# Altium PCB EMG_Sensors_Power.PcbDoc
Units mm, origin at the board's own origin, x right, y up, seen from the top; angles counter-clockwise.
Board outline 30 x 55.02 mm, 2 copper layers (Top Layer, Bottom Layer), stack 1.57 mm thick; 27 components, 17 nets, 112 pads, 15 vias.
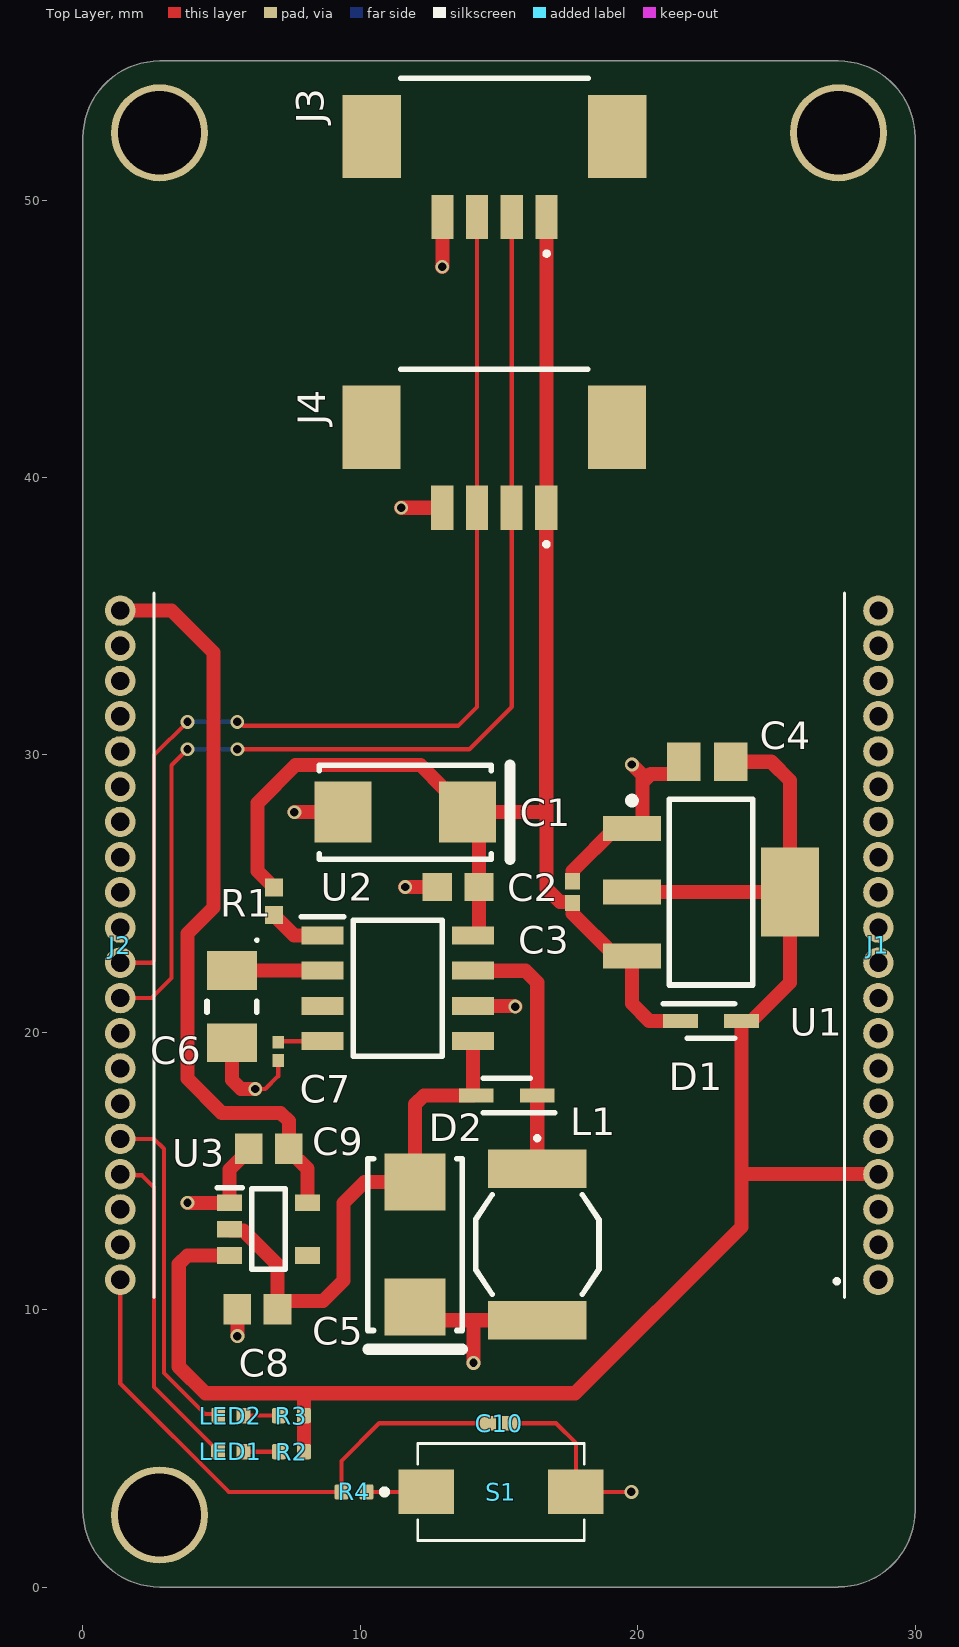
[diagram p0: Top Layer view]
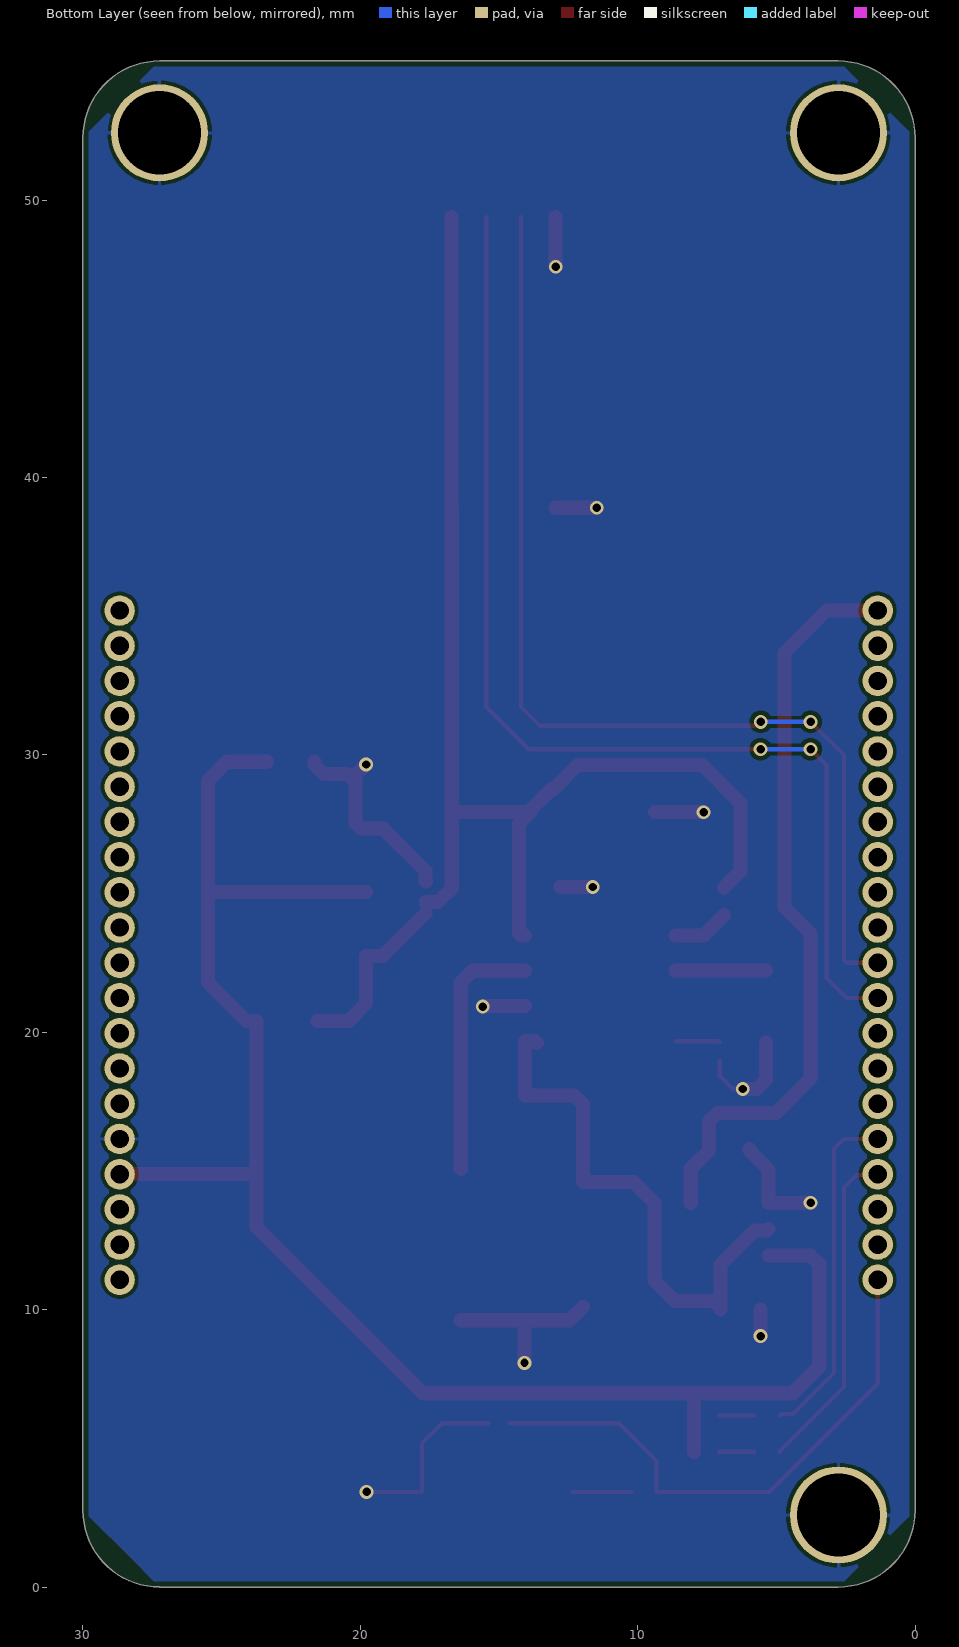
[diagram p1: Bottom Layer view, seen from below]
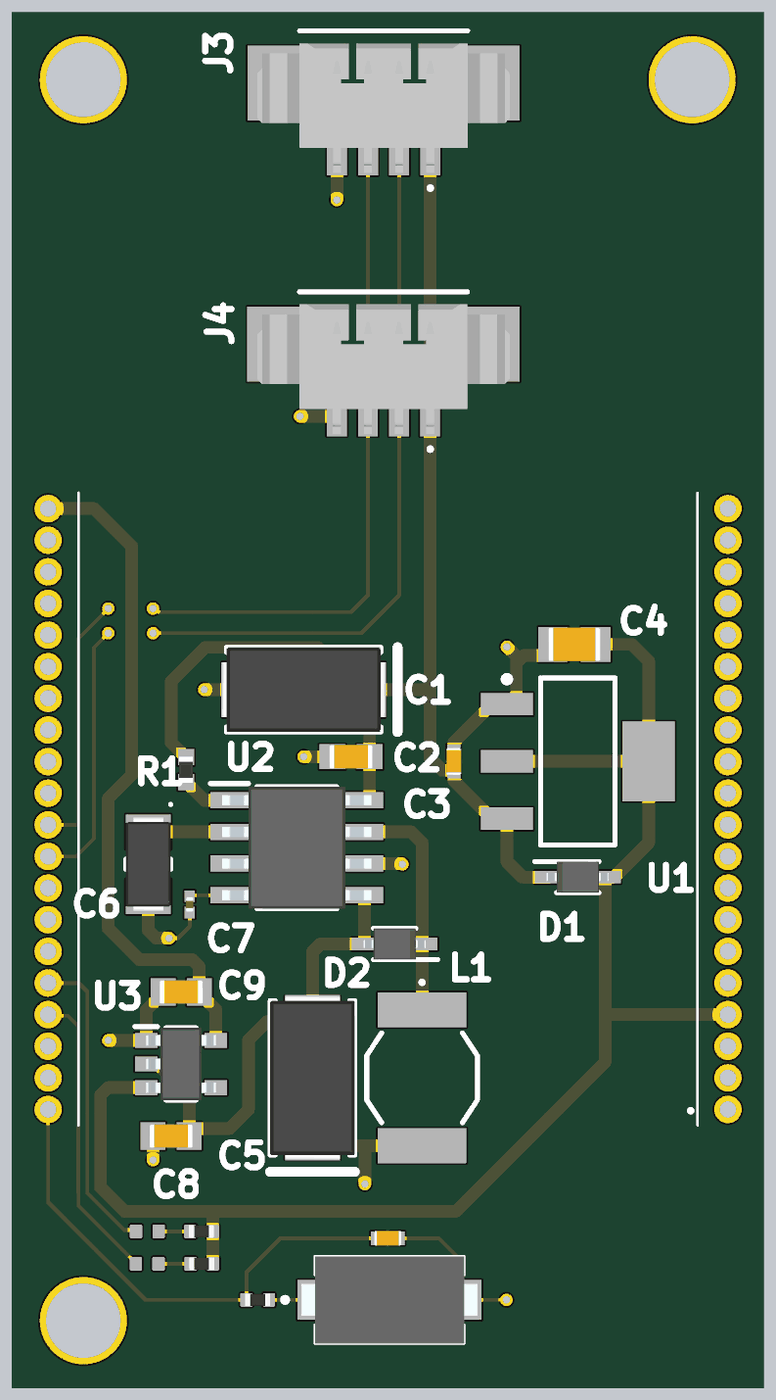
[diagram p2: 3D render of the assembled board from above, using the file's embedded part models]

## Layer stack, top to bottom
Top Solder: solder mask 0.01, Solder Resist, Dk 3.8
Top Layer: signal copper 0.035
Dielectric: core 1.5, FR-4, Dk 4.5
Bottom Layer: signal copper 0.035
Bottom Solder: solder mask 0.01, Solder Resist, Dk 3.8

## Board outline
0,2.763 0,52.254 cw(c2.762,52.254) 2.762,55.016 27.235,55.016 cw(c27.235,52.254) 29.997,52.254 29.997,2.764 cw(c27.235,2.764) 27.235,0.001 27.235,0 2.762,0 cw(c2.762,2.763)

## Design rules (kind name [scope] priority, off if disabled: settings)
BoardOutlineClearance [All] p1: gap=0.2 ignorepadtopadclearanceinfootprint=FALSE
Clearance [All] p1: gap=0.127 ignorepadtopadclearanceinfootprint=FALSE except(0.2: Arc-SMDPad Arc-THPad Track-SMDPad Track-THPad; 0.25: SMDPad-Hole THPad-Hole Via-Hole Fill-Hole Poly-Hole Region-Hole Text-Hole; 0.254: Arc-Via Track-Via; 0.33: Arc-Hole Track-Hole)
ComponentClearance [All] p1: gap=0.127 collisioncheckmode=3 verticalgap=0.127 showdistances=TRUE
DiffPairsRouting [All] p1: maxlimit=0.254 minlimit=0.127 mostfreqgap=0.127 toplayer_minwidth=0.127 toplayer_maxwidth=25.4 toplayer_prefwidth=0.127 bottomlayer_minwidth=0.127 bottomlayer_maxwidth=25.4 bottomlayer_prefwidth=0.127 maxuncoupledlength=12.7
Height [All] p1: minheight=0 maxheight=1816.048 prefheight=12.7
HoleSize [All] p1: absolutevalues=TRUE maxlimit=6.3 minlimit=0.3 maxpercent=80.000 minpercent=20.000
HoleToHoleClearance [All] p1: gap=0.25 allowstackedmicrovias=FALSE
MinimumAnnularRing [All] p1: minimumring=0.076
MinimumSolderMaskSliver [All] p1: minsoldermaskwidth=0
PlaneClearance [All] p1: clearance=0.127
PlaneConnect PlaneConnectPowerPads [InPadClass('PowerPads')] p1: planeconnectstyle=Direct reliefexpansion=0.508 reliefentries=4 reliefconductorwidth=0.254 reliefairgap=0.254
PlaneConnect [All] p2: pad.planeconnectstyle=Relief pad.reliefexpansion=0.3 pad.reliefentries=4 pad.reliefconductorwidth=0.127 pad.reliefairgap=0.127 via.planeconnectstyle=Direct via.reliefexpansion=0.3 via.reliefentries=4 via.reliefconductorwidth=0.127 via.reliefairgap=0.127
PolygonConnect PolygonConnectPowerPads [All vs (InPadClass('PowerPads'))] p1: connectstyle=Direct reliefconductorwidth=0.254 reliefentries=4 polygonreliefangle="90 Angle" airgapwidth=0.254
PolygonConnect [All] p2: thpad.connectstyle=Relief thpad.reliefconductorwidth=0.127 thpad.reliefentries=4 thpad.polygonreliefangle="90 Angle" thpad.airgapwidth=0.127 smdpad.connectstyle=Relief smdpad.reliefconductorwidth=0.127 smdpad.reliefentries=4 smdpad.polygonreliefangle="90 Angle" smdpad.airgapwidth=0.127 via.connectstyle=Direct via.reliefconductorwidth=0.127 via.reliefentries=4 via.polygonreliefangle="90 Angle" via.airgapwidth=0.127
RoutingVias [All] p1: holewidth=0.3 width=0.5 viastyle="Through Hole" minholewidth=0.3 minwidth=0.5 maxholewidth=1.5 maxwidth=6.6
SilkToSilkClearance [All] p1: silktosilkclearance=0
SilkToSolderMaskClearance [IsPad] p1: minsilkscreentomaskgap=0.127 clearancetoexposedcopper=TRUE
SolderMaskExpansion [All] p1: expansion=0.075 istentingtop=FALSE
Width [All] p1: maxlimit=0.508 minlimit=0.152 preferedwidth=0.254 minimp=50.000000 maximp=50.000000 favimp=50.000000
20 further rules are at their usual default settings.

## Components (designator, comment, footprint, x,y, rotation, side; value= is the part's Value field where it differs from the comment)
C1 "TAJC476K016RNJ" AVX-TAJ-C-2_L 11.618,27.934 r180 top value=47µF
C2 "Capacitor 1 uF +/- 10% 16 V 0603" CAPC1608X94X35NL15T15 13.523,25.239 r180 top value=1µF
C3 "Capacitor 0.1 uF +/- 5% 16 V 0402" CAPC1005X56X25LL10T15 17.654,25.053 r90 top value=100nF
C4 "Capacitor 10 uF +/- 10% 16 V 0805" CAPC2013X135X45NL10T25 22.507,29.752 r180 top value=10µF
C5 "TAJC107K010RNJ" AVX-TAJ-C-2_L 11.974,12.347 r90 top value=100µF
C6 "TAJA106K016RNJ" CAPMP3217X18-T_V 5.372,20.924 r270 top value=10µF
C7 "82pF" CAPC0603X33N 7.037,19.308 r270 top
C8 "Capacitor 1uF +/- 10% 16V 0603" CAPC1608X90X35ML15T15 6.291,10.006 r0 top value=1µF
C9 "Capacitor 1uF +/- 10% 16V 0603" CAPC1608X90X35ML15T15 6.698,15.794 r0 top value=1µF
C10 "Capacitor 0.1 uF +/- 5% 16 V 0402" CAPC1005X56X25LL10T15 14.999,5.904 r0 top value=100nF
D1 "B5819WS-TP" SOD2512X115N 22.639,20.405 r0 top
D2 "B5817WS-TP" SOD2512X115N 15.279,17.72 r180 top
J1 "TMS-120-02-G-S" TMS-120-YY-XX-S 28.677,11.074 r90 top locked
J2 "TMS-120-02-G-S" TMS-120-YY-XX-S 1.346,11.074 r90 top locked
J3 "53261-0471" 53261-0471 14.834,50.19 r180 top
J4 "53261-0471" 53261-0471 14.828,39.708 r180 top
L1 "10µH" DO1608C 16.379,12.347 r270 top
LED1 "QBLP595-IG" QTB-QBLP595_V 5.329,4.877 r0 top
LED2 "QBLP595-IG" QTB-QBLP595_V 5.333,6.179 r0 top
R1 "Resistor 10k +/-1% 0402 63 mW" RESC1005X40X25ML05T05 6.887,24.719 r270 top value=10k
R2 "Resistor 330R +/-5 % 0402 63 mW" RESC0402(1005)_L 7.518,4.877 r180 top value=330
R3 "Resistor 330R +/-5 % 0402 63 mW" RESC0402(1005)_L 7.512,6.179 r180 top value=330
R4 "Resistor 330R +/-5 % 0402 63 mW" RESC0402(1005)_L 9.771,3.429 r0 top value=330
S1 "DTSM-31N-V-T_R" DTSM32NVTR 15.071,3.429 r0 top
U1 "LD1117S33TR" SOT-223_L 22.639,25.053 r0 top
U2 "TPS6735ID" SOIC127P600X175-8N 11.346,21.584 r0 top
U3 "XC6901D331MR-G" SOT95P280X130-5N 6.687,12.901 r0 top

## Footprints (in the part's own frame and the unit in brackets; to place one, negate y for a bottom-side part, rotate by r counter-clockwise, add the part's x,y. Pads: shape width x height; smd on the part's side, far side on the other; paste and mask are expansions set on the pad)
53261-0471 [mm]
  rect 0.8x1.6 smd: 1(-1.875,0.8) 2(-0.625,0.8) 3(0.625,0.8) 4(1.875,0.8)
  rect 2.1x3 smd: 5(4.425,-2.1) 6(-4.425,-2.1)
  silkscreen extent -3.37,-4.2 3.37,2.17, body extent -5.07,-3.69 5.07,1.51, height 3.4
AVX-TAJ-C-2_L [mm] "Molded Capacitor, 2-Leads, Body 6.2x3.4mm, IPC High Density"
  rect 2.05x2.2 smd: 1(-2.25,0) 2(2.25,0)
  silkscreen extent -3.77,-1.7 3.1,1.7, body extent -3.32,-1.7 3.32,1.7, height 2.8
CAPC0603X33N [mm]
  rect 0.46x0.42 smd: 1(-0.33,0) 2(0.33,0)
  body extent -0.3,-0.15 0.3,0.15, height 0.33
CAPC1005X56X25LL10T15 [mm] "Chip Capacitor, 2-Leads, Body 1.10x0.60mm, IPC High Density"
  rect 0.58x0.54 smd: 1(-0.39,0) 2(0.39,0)
  body extent -0.55,-0.3 0.55,0.3, height 0.56
CAPC1608X90X35ML15T15 [mm] "Chip Capacitor, 2-Leads, Body 1.75x0.95mm, IPC Low Density"
  rect 1x1.1 smd: 1(-0.725,0) 2(0.725,0)
  body extent -0.87,-0.48 0.87,0.48, height 0.9
CAPC1608X94X35NL15T15 [mm] "Chip Capacitor, 2-Leads, Body 1.75x0.96mm, IPC Medium Density"
  rect 1.05x1 smd: 1(-0.75,0) 2(0.75,0)
  body extent -0.87,-0.48 0.87,0.48, height 0.94
CAPC2013X135X45NL10T25 [mm] "Chip Capacitor, 2-Leads, Body 2.10x1.35mm, IPC Medium Density"
  rect 1.2x1.4 smd: 1(-0.85,0) 2(0.85,0)
  body extent -1.05,-0.67 1.05,0.67, height 1.35
CAPMP3217X18-T_V [mm] "Molded Capacitor, 2-Leads, Body 3.40x1.8mm"
  rect 1.4x1.8 smd: 1(-1.3,0) 2(1.3,0)
  silkscreen extent -2.45,-0.9 0.2,0.95, body extent -1.92,-0.9 1.92,0.9, height 1.8
DO1608C [mm]
  rect 1.4x3.56 smd: 1(-2.73,0) 2(2.73,0)
  silkscreen extent -3.88,-2.22 1.8,2.22
DTSM32NVTR [mm]
  rect 2x1.6 smd: 1(-2.7,0) 2(2.7,0)
  silkscreen extent -4.3,-1.75 3,1.75, body extent -3.54,-1.75 3.54,1.75, height 5.1
QTB-QBLP595_V [mm] "SMD, 2-Leads, Body 1x0.5mm"
  rrect25% 0.5x0.55 smd: 1(-0.455,0) 2(0.455,0)
  body extent -0.5,-0.25 0.5,0.25, height 0.5
RESC0402(1005)_L [mm] "Chip Resistor, Body 1.0x0.5mm, IPC High Density"
  rrect25% 0.5x0.55 smd: 1(-0.45,0) 2(0.45,0)
  body extent -0.5,-0.25 0.5,0.25, height 0.3
RESC1005X40X25ML05T05 [mm] "Chip Resistor, 2-Leads, Body 1.05x0.55mm, IPC Low Density"
  rect 0.65x0.65 smd: 1(-0.5,0) 2(0.5,0)
  body extent -0.53,-0.28 0.53,0.28, height 0.4
SOD2512X115N [mm]
  rect 1.25x0.5 smd: 1(-1.1,0) 2(1.1,0)
  silkscreen extent -1.73,-0.63 0.85,0.63, body extent -1.25,-0.63 1.25,0.63, height 1.15
SOIC127P600X175-8N [mm]
  rect 1.525x0.65 smd: 1(-2.712,1.905) 2(-2.712,0.635) 3(-2.712,-0.635) 4(-2.712,-1.905) 5(2.712,-1.905) 6(2.712,-0.635) 7(2.712,0.635) 8(2.712,1.905)
  silkscreen extent -3.47,-2.45 1.6,2.58, body extent -3,-2.45 3,2.45, height 1.75
SOT95P280X130-5N [mm]
  rect 0.9x0.6 smd: 1(-1.4,0.95) 2(-1.4,0) 3(-1.4,-0.95) 4(1.4,-0.95) 5(1.4,0.95)
  silkscreen extent -1.85,-1.45 0.6,1.5, body extent -1.4,-1.45 1.4,1.45, height 1.3
SOT-223_L [mm] "SOT223, 4-Leads, Body 6.5x3.5mm, Pitch 2.3mm, Lead Span 7mm, IPC High Density"
  rect 2.1x0.9 smd: 1(-2.85,2.3) 2(-2.85,0) 3(-2.85,-2.3)
  rect 2.1x3.2 smd: 4(2.85,0)
  silkscreen extent -2.97,-3.35 1.5,3.42, body extent -1.85,-3.35 1.85,3.35, height 1.8
TMS-120-YY-XX-S [mm]
  round 1.1 hole 0.66: 1(0,0) 2(1.27,0) 3(2.54,0) 4(3.81,0) 5(5.08,0) 6(6.35,0) 7(7.62,0) 8(8.89,0) 9(10.16,0) 10(11.43,0) 11(12.7,0) 12(13.97,0) 13(15.24,0) 14(16.51,0) 15(17.78,0) 16(19.05,0) 17(20.32,0) 18(21.59,0) 19(22.86,0) 20(24.13,0)
  silkscreen extent -0.64,1.22 24.77,1.55

## Part data
C1: library part CMP-001-00047-7, "Standard Tantalum, 47 uF, +/- 10%, 16 V, -55 to 125 degC, 2312 (6032 Metric), RoHS, Tape and Reel", Capacitor Type=Tantalum, Case/Package=2312, Manufacturer=AVX, Max Operating Temperature=125°C, Min Operating Temperature=-55°C, Package Description="2-Pin Surface Mount Device, Body 6 x 3.25 mm", Package Quantity=500, Package Reference=TAJ-C-2, Resistance=0.5Ohm, Tolerance=10%, Voltage Rating=16V, Datasheet URL=http://datasheets.avx.com/TAJ.pdf, Datasheet Version=Feb-16, ESR=500mohm, Manufacturer URL=http://www.avx.com/, Mounting Technology=SM, Packaging=TapeandReel, Pins=2, RoHS Compliant=True
C2: library part CMP-001-00003-6, "Chip Capacitor, 1 uF, +/- 10%, 16 V, 0603 (1608 Metric)", Capacitor Type=Ceramic, Case/Package=0603, Max Operating Temperature=125°C, Min Operating Temperature=-55°C, Tolerance=10%, Voltage Rating=16V, Mounting Technology=SM, Pins=2, RoHS Compliant=True
C3 C10: library part CMP-001-00001-6, "Chip Capacitor, 0.1 uF, +/- 5%, 16 V, 0402 (1005 Metric)", Capacitor Type=Ceramic, Case/Package=0402, Max Operating Temperature=125°C, Min Operating Temperature=-55°C, Tolerance=5%, Voltage Rating=16V, Mounting Technology=SM, Pins=2, RoHS Compliant=True
C4: library part CMP-001-00015-6, "Chip Capacitor, 10 uF, +/- 10%, 16 V, 0805 (2012 Metric)", Capacitor Type=Ceramic, Case/Package=0805, Max Operating Temperature=85°C, Min Operating Temperature=-55°C, Tolerance=10%, Voltage Rating=16V, Mounting Technology=SM, Pins=2, RoHS Compliant=True
C5: library part CMP-001-00045-7, "Standard Tantalum, 100 uF, +/- 10%, 10 V, -55 to 125 degC, 2312 (6032 Metric), RoHS, Tape and Reel", Capacitor Type=Tantalum, Case/Package=2412, Manufacturer=AVX, Max Operating Temperature=125°C, Min Operating Temperature=-55°C, Package Description="2-Pin Surface Mount Device, Body 6 x 3.25 mm", Package Quantity=500, Package Reference=TAJ-C-2, Tolerance=10%, Voltage Rating=10V, Datasheet URL=http://datasheets.avx.com/TAJ.pdf, Datasheet Version=Feb-16, ESR=1.2Ohm, Manufacturer URL=http://www.avx.com/, Mounting Technology=SM, Packaging=TapeandReel, Pins=2, RoHS Compliant=True
C6: library part CMP-001-00041-7, "Standard Tantalum, 10 uF, +/- 10%, 16 V, -55 to 125 degC, 1206 (3216 Metric), RoHS, Tape and Reel", Capacitor Type=Tantalum, Case/Package=1206, Manufacturer=AVX, Max Operating Temperature=125°C, Min Operating Temperature=-55°C, Package Description="2-Pin Surface Mount Device, Body 3.2 x 1.65 mm", Package Quantity=1, Package Reference=CAPMP3217X18-T, Tolerance=10%, Voltage Rating=16V, Datasheet URL=http://datasheets.avx.com/TAJ.pdf, Datasheet Version=Feb-16, ESR=3Ohm, Manufacturer URL=http://www.avx.com/, Mounting Technology=SM, Package URL=http://www.avx.com/download/software/literature/AVX-Footprint-Library.pdf, Packaging=TapeandReel, Pins=2, RoHS Compliant=True
C7: library part GRM0335C1H820JA01D, "Capacitor 82pF", Manufacturer_Name="Murata Electronics", Datasheet Link=https://psearch.en.murata.com/capacitor/product/GRM0335C1H820JA01%23.html, Height=0.33mm, Manufacturer_Part_Number=GRM0335C1H820JA01D
C8 C9: library part CMP-001-00004-6, "Chip Capacitor, 1 uF, +/- 10%, 16 V, 0603 (1608 Metric)", Capacitor Type=Ceramic, Case/Package=0603, Max Operating Temperature=125°C, Min Operating Temperature=-55°C, Tolerance=10%, Voltage Rating=16V, Mounting Technology=SM, Pins=2, RoHS Compliant=True
D1: "Diode", Manufacturer_Name="Micro Commercial Components (MCC)", Mouser Part Number=833-B5819WS-TP, Arrow Part Number=B5819WS-TP, Arrow Price/Stock=https://www.arrow.com/en/products/b5819ws-tp/micro-commercial-components?region=nac, Datasheet Link=https://www.arrow.com/en/products/b5819ws-tp/micro-commercial-components, Height=1.15mm, Manufacturer_Part_Number=B5819WS-TP, Mouser Price/Stock=https://www.mouser.co.uk/ProductDetail/Micro-Commercial-Components-MCC/B5819WS-TP?qs=SdqRYZZ9IxBOLbXcW6zYBA%3D%3D
D2: "Schottky Diode", Manufacturer_Name="Micro Commercial Components (MCC)", Mouser Part Number=833-B5817WS-TP, Arrow Part Number=B5817WS-TP, Arrow Price/Stock=https://www.arrow.com/en/products/b5817ws-tp/micro-commercial-components?region=europe, Datasheet Link=https://www.mouser.co.uk/datasheet/2/258/B5817WS-B5819WS(SOD-323)-V2-1626103.pdf, Height=1.15mm, Manufacturer_Part_Number=B5817WS-TP, Mouser Price/Stock=https://www.mouser.co.uk/ProductDetail/Micro-Commercial-Components-MCC/B5817WS-TP?qs=SdqRYZZ9IxCAZAlW9BKhPg%3D%3D
J1 J2: "Connector - female needed, place under board", Manufacturer_Name=SAMTEC, Mouser Part Number=200-TMS12002GS, Datasheet Link=http://suddendocs.samtec.com/prints/tms-1xx-xx-xx-x-xx-xxx-mkt.pdf, Manufacturer_Part_Number=TMS-120-02-G-S, Mouser Price/Stock=https://www.mouser.co.uk/ProductDetail/Samtec/TMS-120-02-G-S?qs=0lQeLiL1qyZLykZTiH0Mag%3D%3D
J3 J4: "Connector", Manufacturer_Name=Molex, Mouser Part Number=538-53261-0471, Datasheet Link=http://www.molex.com/webdocs/datasheets/pdf/en-us//0532610471_PCB_HEADERS.pdf, Manufacturer_Part_Number=53261-0471, Mouser Price/Stock=https://www.mouser.co.uk/ProductDetail/Molex/53261-0471?qs=%252B72YyncTwW9e3et3PwnEMw%3D%3D
L1: library part DO1608C-103MLC, "Inductor 10µH", Manufacturer_Name=COILCRAFT, Mouser Part Number=994-DO1608C-103MLC, Datasheet Link=https://www.coilcraft.com/pdfs/do1608c.pdf, Manufacturer_Part_Number=DO1608C-103MLC, Mouser Price/Stock=https://www.mouser.co.uk/ProductDetail/Coilcraft/DO1608C-103MLC?qs=zCSbvcPd3pYY5dYqZHdNQA%3D%3D
LED1 LED2: library part CMP-007-00041-3, "Chip LED 0402, Green, 0.02 A, 3.1 to 3.7 V, -40 to 80 degC, 2-Pin SMD, RoHS, Tape and Reel", Case/Package=0402, Colour=Green, Mounting Technology=SMT, Pins=2, RoHS Compliant=Yes
R1: library part CMP-009-00019-5, "Chip Resistor, 10 KOhm, +/- 1%, 63 mW, -55 to 155 degC, 0402 (1005 Metric)", Case/Package=0402, Max Operating Temperature=155°C, Min Operating Temperature=-55°C, Power=63mW, Tolerance=1%, Voltage Rating=50V, Mounting Technology=SM, Pins=2, RoHS Compliant=True
R2 R3 R4: library part CMP-009-00132-3, "Chip Resistor, 330 Ohms, +/-5 %, 63 mW, -55 to 155 degC, 0402", Case/Package=0402, Max Operating Temperature=155°C, Min Operating Temperature=-55°C, Power=63mW, Tolerance=5%, Pins=2
S1: "Switch", Manufacturer_Name=Diptronics, Manufacturer_Part_Number=DTSM-31N-V-T/R, Mouser Part Number=113-DTSM31NVTR, Datasheet Link=http://www.dip.com.tw/en/en-product-information/en-switch004/item/2444-dts-3-dtsm-l-3, Height=5mm, Mouser Price/Stock=https://www.mouser.co.uk/ProductDetail/Diptronics/DTSM-31N-V-T-R?qs=MLItCLRbWszzBdU5lCl7JA%3D%3D
U1: library part CMP-0244-00310-1, "Fixed Low Drop Positive Voltage Regulator, 3.3V, 4-Pin SOT-223, Tape and Reel", ComponentLink1Description="Manufacturer URL", ComponentLink1URL=http://www.st.com, ComponentLink2Description=Datasheet, ComponentLink2URL=http://www.st.com/internet/com/TECHNICAL_RESOURCES/TECHNICAL_LITERATURE/DATASHEET/CD00000544.pdf, DatasheetVersion=1/11/2011, PackageDescription="4-Pin SOT-223 Package, 6.5 x 3.5 mm Body, 2.3 mm Pitch, 7 mm Lead Span", PackageReference=SOT-223, PackageVersion=2010
U2: "Power Supply", Manufacturer_Name="Texas Instruments", Mouser Part Number=595-TPS6735ID, Datasheet Link=https://www.ti.com.cn/cn/lit/ds/symlink/tps6735.pdf?ts=1616851433916&ref_url=https%253A%252F%252Fwww.ti.com.cn%252Fsitesearch%252Fcn%252Fdocs%252Funiversalsearch.tsp%253FsearchTerm%253Dtps6735, Height=1.75mm, Manufacturer_Part_Number=TPS6735ID, Mouser Price/Stock=https://www.mouser.co.uk/ProductDetail/Texas-Instruments/TPS6735ID?qs=YhsVCygOPE2B2F%252BGef%2FDjA%3D%3D
U3: "Power Supply", Manufacturer_Name=Torex, Mouser Part Number=865-XC6901D331MR-G, Datasheet Link=https://ms.componentsearchengine.com/Datasheets/2/XC6901D331MR-G.pdf, Height=1.3mm, Manufacturer_Part_Number=XC6901D331MR-G, Mouser Price/Stock=https://www.mouser.co.uk/ProductDetail/Torex-Semiconductor/XC6901D331MR-G?qs=AsjdqWjXhJ%2FQIk2kdQmgqw%3D%3D

## Free pads (board coordinates)
  round 3.5 hole 3: 2(2.762,2.594) 2(2.762,52.426) 2(27.235,52.426)

## Via types
v1: diameter 0.5, hole 0.3, Top Layer to Bottom Layer, 15 vias

## Nets (pads, with @x,y where several pads share a name; then routed paths per layer and width w, separated by ;. In a path a pad name is that pad's centre, name@x,y a point inside that pad or via, vN(x,y) a via of type N, cw(c..) or ccw(c..) an arc to the next point about the centre after c; other vN are vias at no path point)
+3.3V: C4.1 D1.2 J1.4 R2.1 R3.1 U1.2 U1.4 U3.3 | length 61
  Top Layer w0.508: U3.3 3.765,11.951 3.454,11.64 3.454,7.941 4.41,6.985 7.962,6.985 ; R2.1 7.968,4.894 7.962,4.9 R3.1 7.962,6.985 ; U1.2 U1.4 ; C4.1 24.814,29.752 25.489,29.077 U1.4 ; J1.4 23.739,14.884 ; 7.962,6.985 17.743,6.985 23.739,12.981 23.739,14.884 ; 23.739,14.884 D1.2 24.106,20.405 25.489,21.788 U1.4
-3.3V: C9.2 J2.20 U3.5 | length 27.2
  Top Layer w0.508: J2.20 3.187,35.204 4.705,33.686 4.705,24.5 3.765,23.56 3.765,18.333 5.003,17.095 7.125,17.095 7.423,16.798 C9.2 7.423,15.744 8.087,15.079 U3.5
"-5 V": C5.2 C8.2 D2.2 U2.5 U3.2 | length 19.8
  Top Layer w0.508: U3.2 5.333,12.855 5.78,12.855 7.016,11.62 C8.2@7.016,10.056 ; C8.2 C8.2@7.016,10.056 ; U2.5@13.639,19.608 13.71,19.679 U2.5 14.058,17.724 14.062,17.72 12.29,17.72 11.974,17.404 C5.2 10.142,14.597 9.396,13.851 9.396,11.056 8.653,10.312 7.322,10.312 7.312,10.302 7.262,10.302 C8.2@7.016,10.056
\R\E\S\E\T\: C10.1 J2.1 R4.1 | length 20.3
  Top Layer w0.152: J2.1 1.346,7.341 5.258,3.429 R4.1 9.321,4.548 10.677,5.904 C10.1
GND: C1.2 C2.2 C3.2 C4.2 C5.1 C6.2 C7.2 C8.1 C9.1 C10.2 J1.5 J3.4 J4.4 L1.2 pad.2 S1.2 U1.1 U2.6 U3.1 | length 36.6
  Top Layer w0.152: v1(6.212,17.952) 6.571,17.952 7.037,18.418 C7.2 ; C10.2 17.054,5.904 17.771,5.187 S1.2 v1(19.771,3.429)
  Top Layer w0.508: v1(3.765,13.851) U3.1 5.287,15.058 5.973,15.744 C9.1 ; C6.2@5.369,19.624 5.369,18.281 5.699,17.952 v1(6.212,17.952) ; v1(5.566,9.043) C8.1 ; v1(7.621,27.934) C1.2 ; v1(11.474,38.908) J4.4 ; v1(11.618,25.239) C2.2 ; C5.1 12.454,9.617 14.08,9.617 ; v1(12.953,47.6) 12.959,47.605 J3.4 ; U2.6 15.559,20.949 v1(15.585,20.924) ; v1(14.08,8.081) 14.08,9.617 ; L1.2 14.08,9.617 ; C3.2@17.638,25.443 17.654,25.459 17.654,25.818 19.189,27.353 19.976,27.353 20.172,27.549 20.172,29.009 ; v1(19.789,29.652) 20.172,29.269 20.172,29.009 ; C4.2 21.657,29.652 21.311,29.306 20.47,29.306 20.172,29.009
LED1: J2.4 LED1.1 | length 11.9
  Top Layer w0.152: J2.4 1.389,14.842 2.125,14.842 2.565,14.401 2.565,7.72 2.565,7.211 4.874,4.902 LED1.1
LED2: J2.5 LED2.1 | length 12.4
  Top Layer w0.152: J2.5 2.565,16.154 2.921,15.799 2.921,7.72 4.4,6.241 4.816,6.241 LED2.1
MST_I2C_SCL: J2.9 J3.2 J4.2 | length 40.6
  Top Layer w0.152: J2.9 2.466,21.234 3.187,21.955 3.187,29.624 v1(3.765,30.202) ; v1(5.566,30.202) 13.929,30.202 15.459,31.732 J3.2 J3.2@15.453,49.385
  Bottom Layer w0.152: v1(3.765,30.202) v1(5.566,30.202)
MST_I2C_SDA: J2.10 J3.3 J4.3 | length 38.8
  Top Layer w0.152: J2.10 2.476,22.504 2.565,22.594 2.565,29.991 v1(3.765,31.191) ; v1(5.563,31.191) 5.643,31.191 5.787,31.047 13.524,31.047 14.203,31.727 J4.3 14.203,49.385 J3.3
  Bottom Layer w0.152: v1(3.765,31.191) v1(5.563,31.191)
NetC6_1: C6.1 U2.2 | length 3.3
  Top Layer w0.508: C6.1@5.369,22.224 C6.1 8.632,22.221 U2.2
NetC7_1: C7.1 U2.4 | length 1.6
  Top Layer w0.152: C7.1 7.078,19.679 U2.4
NetD2_1: D2.1 L1.1 U2.7 | length 9.2
  Top Layer w0.508: U2.7@14.064,22.225 U2.7 15.952,22.219 16.379,21.793 L1.1
NetLED1_2: LED1.2 R2.2 | length 1.3
  Top Layer w0.152: LED1.2 R2.2
NetLED2_2: LED2.2 R3.2 | length 1.3
  Top Layer w0.152: LED2.2 R3.2
NetR1_2: R1.2 U2.1 | length 2
  Top Layer w0.508: R1.2 7.617,23.489 U2.1
NetR4_2: R4.2 S1.1 | length 2.2
  Top Layer w0.152: R4.2 S1.1
VIN: C1.1 C2.1 C3.1 D1.1 J3.1 J4.1 R1.1 U1.3 U2.8 | length 51.7
  Top Layer w0.508: R1.1 6.291,25.816 6.291,28.258 7.667,29.634 12.168,29.634 13.022,28.78 13.097,28.78 13.868,28.009 C1.1 ; U2.8 14.202,23.489 14.273,23.56 C2.1 14.273,27.529 C1.1 ; J4.1 16.703,27.934 ; J4.1@16.706,38.911 J3.1@16.706,49.388 ; C3.1@17.638,24.663 17.638,24.696 17.195,24.696 16.703,25.187 16.703,27.934 ; 17.654,24.288 19.189,22.753 U1.3 19.789,21.03 20.414,20.405 D1.1 ; C1.1 16.703,27.934
pads on no net: J1.1 J1.2 J1.3 J1.6 J1.7 J1.8 J1.9 J1.10 J1.11 J1.12 J1.13 J1.14 J1.15 J1.16 J1.17 J1.18 J1.19 J1.20 J2.2 J2.3 J2.6 J2.7 J2.8 J2.11 J2.12 J2.13 J2.14 J2.15 J2.16 J2.17 J2.18 J2.19 J3.5 J3.6 J4.5 J4.6 U2.3 U3.4

## Polygon pours and split planes (outlines as drawn)
GND on Bottom Layer "GND_L02_P000" (solid, pour order 0): 0,52.254 2.762,55.016 27.235,55.016 29.997,52.254 29.997,2.764 27.235,0.001 27.235,0 2.762,0 0,2.762 0,52.254

## Silkscreen, mask and mechanical layers (free items; w line width, h text height)
Board:
  lines w0.254: 27.235,0 2.762,0 cw(c2.762,2.763) 0,2.763 0,52.254 cw(c2.762,52.254) 2.762,55.016 27.235,55.016 cw(c27.235,52.254) 29.997,52.254 29.997,2.764 cw(c27.235,2.764) 27.235,0.001